# EAGLE board RGB_speakerbadge_thruvias (EAGLE 5.11)
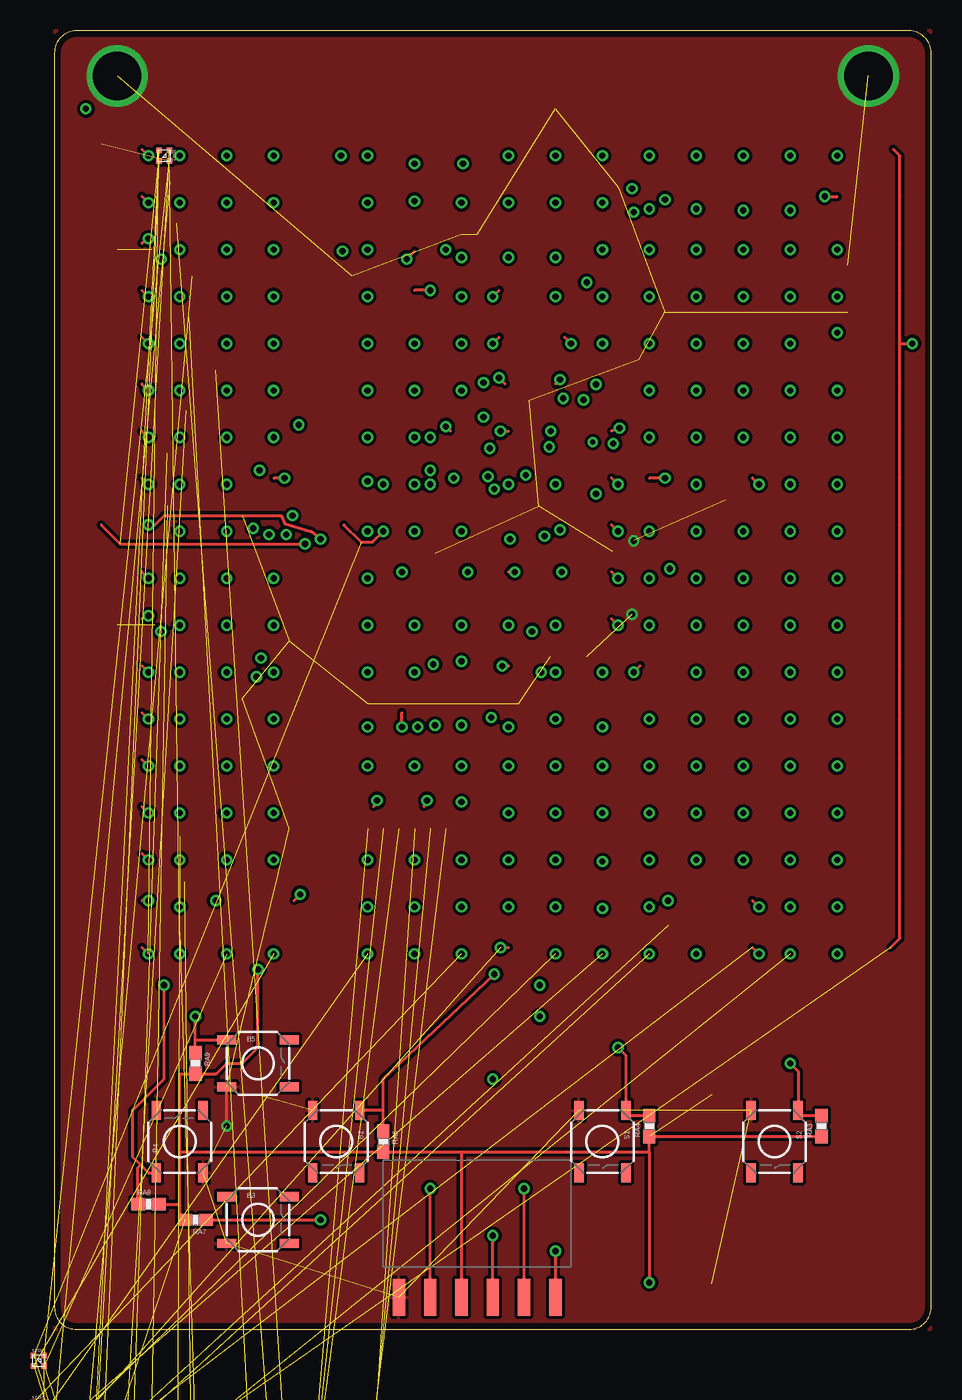
[diagram p0: board, top side]
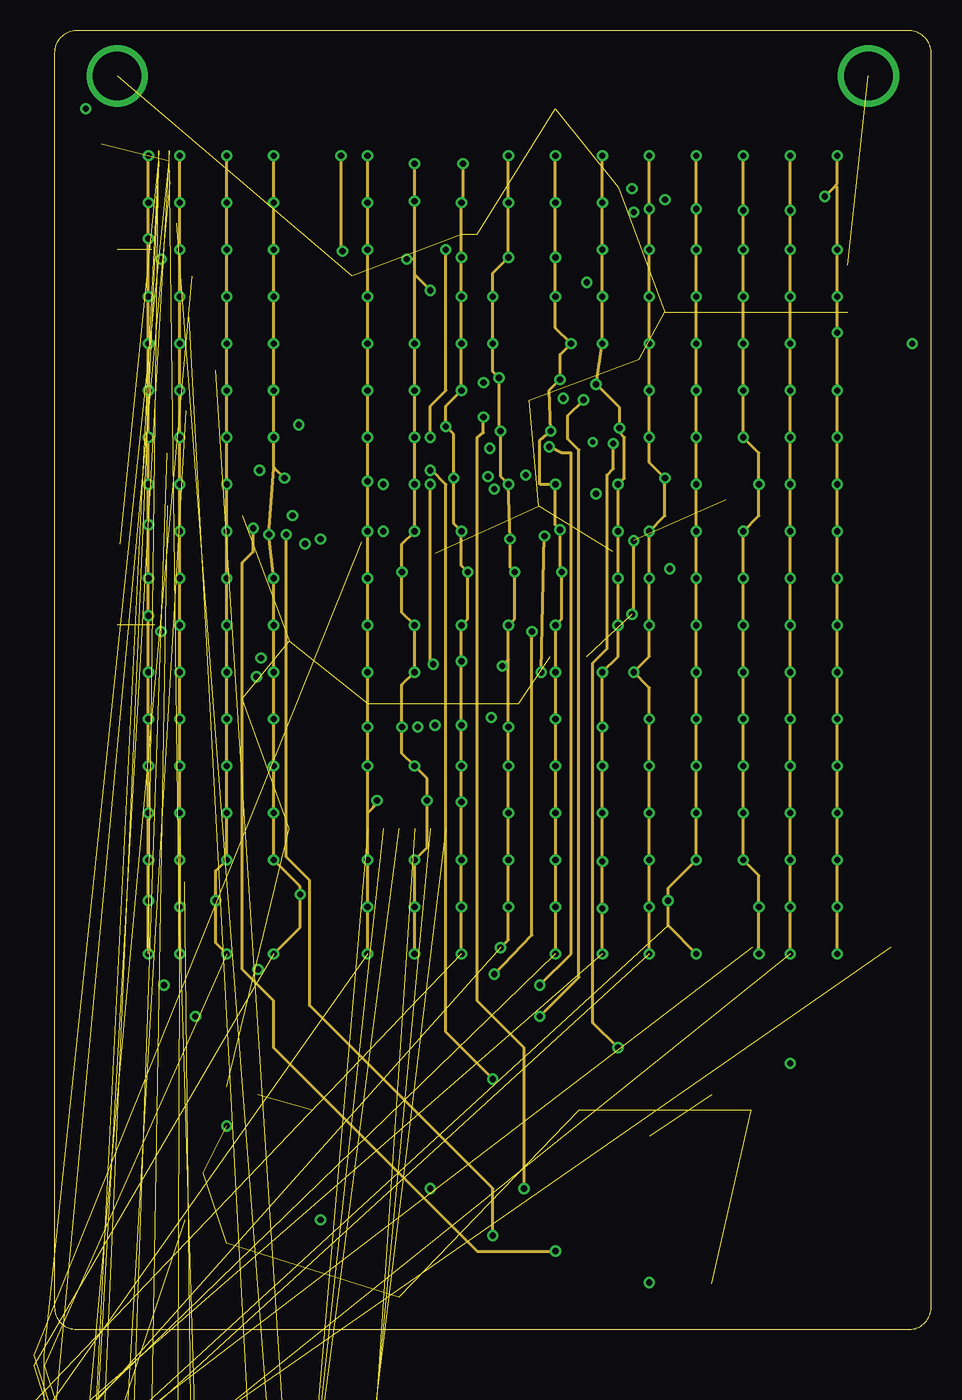
[diagram p1: board, inner layer gnd]
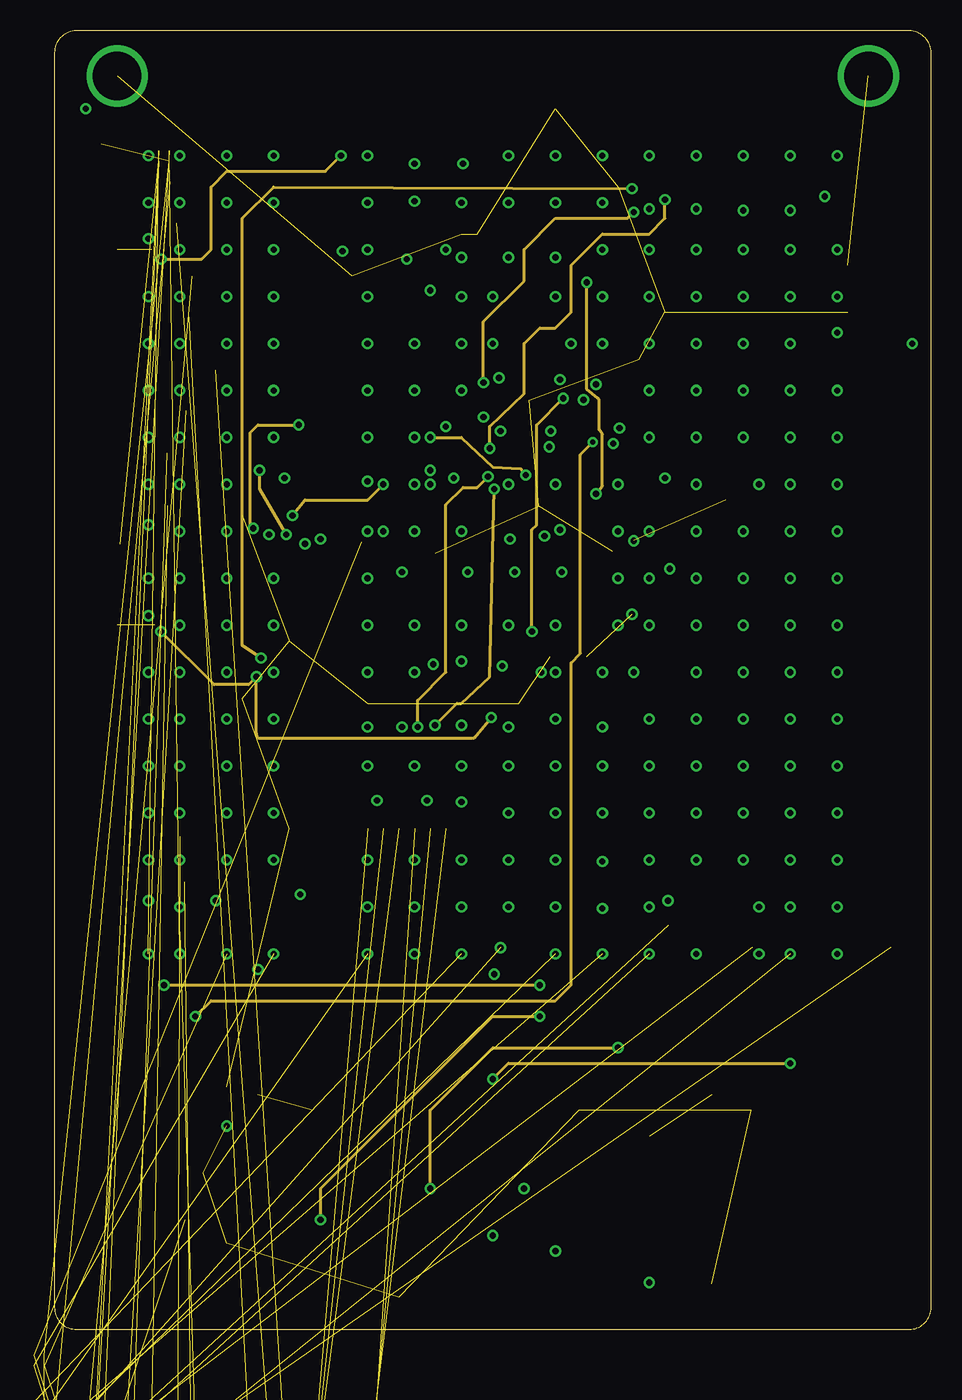
[diagram p2: board, inner layer vcc]
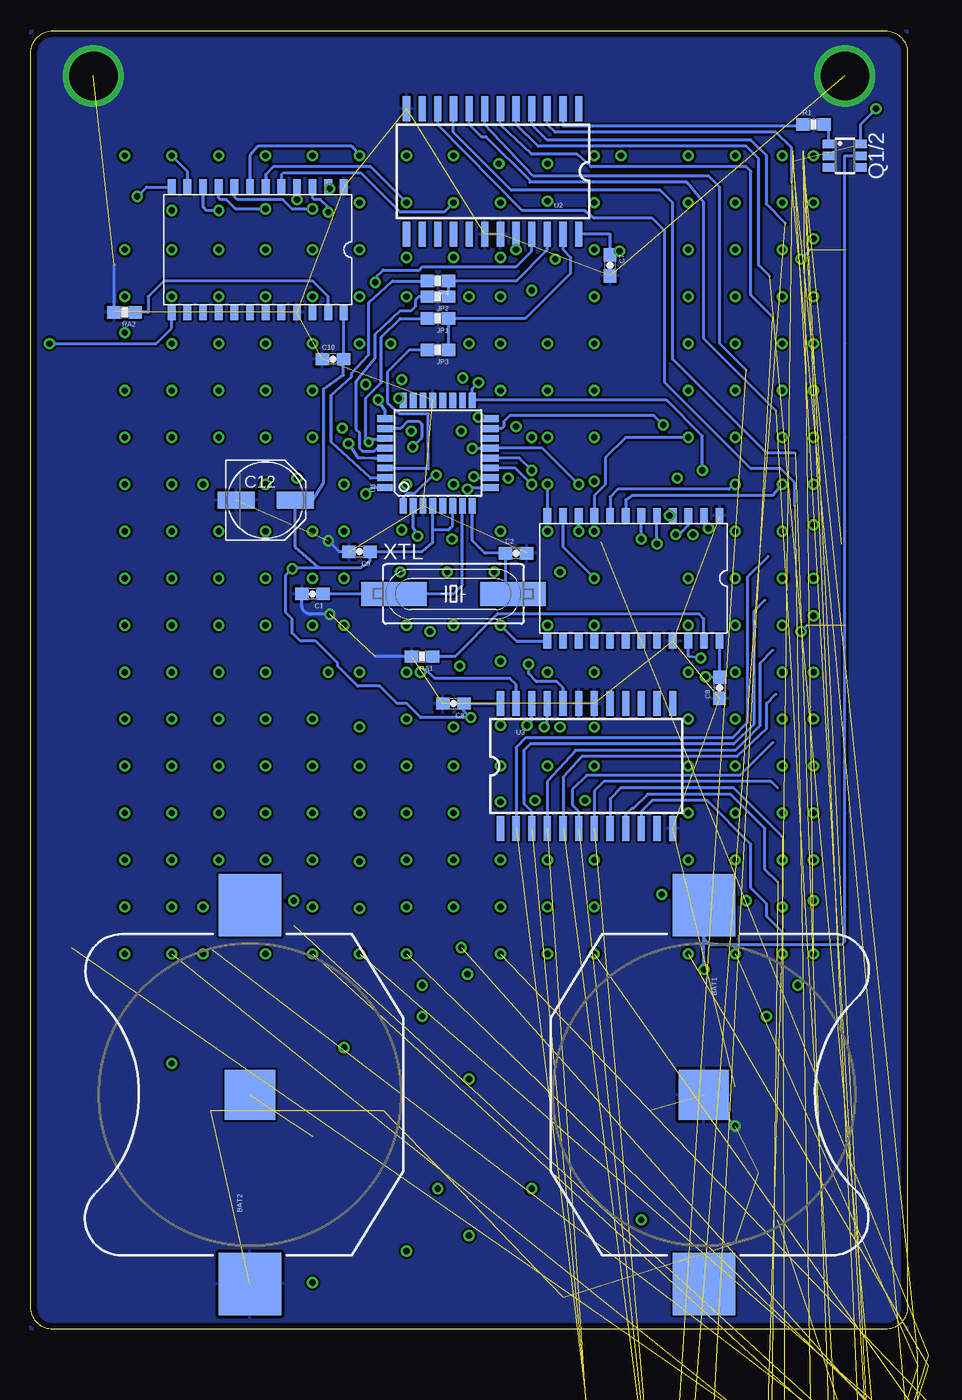
[diagram p3: board, bottom side, seen from below]

Size 71.12 x 105.39 mm. Coordinates in mm from the lower left corner, seen from the top.
Outline: 69.32,0 arc90 71.12,1.8 71.12,103.61 arc90 69.34,105.39 1.78,105.39 arc90 0,103.61 0,1.8 arc90 1.8,0 69.32,0
Copper layers (1*2*3*16): Top 0.0356mm / dielectric 1.5011mm / gnd 0.0356mm / dielectric 0.1499mm / vcc 0.0356mm / dielectric 0.2007mm / Bottom 0.0356mm
Design rules "SilverCircuits4layer *": minimum track width 7mil, minimum drill 14mil, track to track 7mil, track to pad 7mil, pad to pad 7mil, via to via 7mil, smd to smd 0mil, copper to edge 20mil, drill to drill 8mil, minimum pad ring 10mil, minimum via ring 8mil, stop-mask expansion 4mil, vias tented up to drill 0mil, thermal gap 10mil
Milling: 8 lines

## Footprints (pad centres in the part's own frame; a part is rotated, then mirrored left to right if it is on the bottom)
TACTILE_SWITCH_SMD = smd 1.524 x 0.762: 1 -2.54,1.905; 2 2.54,1.905; 3 -2.54,-1.905; 4 2.54,-1.905
NSL_SPARKFUN_BATTCON_245MM = smd 5.08 x 5.08: 1 -15.367,0; 3 15.367,0 | smd 4.064 x 4.064: 2 0,0
SPARKFUN_0603-CAP = smd 1.1 x 1: 1 -0.85,0; 2 0.85,0
PANASONIC_D = smd 3 x 1.4: + 2.4,0; - -2.4,0
SPARKFUN_0603-RES = smd 1.1 x 1: 1 -0.85,0; 2 0.85,0
1X06-SMD_EDGE = smd 1 x 3: 1 0,-0.08; 2 2.54,-0.08; 3 5.08,-0.08; 4 7.62,-0.08; 5 10.16,-0.08; 6 12.7,-0.08
0404_LED = smd 0.45 x 0.45: P$1 0.425,0.425; P$2 0.425,-0.425; P$3 -0.425,-0.425; P$4 -0.425,0.425
SSOT-6 = smd 0.69 x 0.99: 1 -0.95,-1.3; 2 0,-1.3; 3 0.95,-1.3; 4 0.95,1.3; 5 0,1.3; 6 -0.95,1.3
TQFP32-08 = smd 1.27 x 0.559: 1 -4.293,2.8; 2 -4.293,2; 3 -4.293,1.2; 4 -4.293,0.4; 5 -4.293,-0.4; 6 -4.293,-1.2; 7 -4.293,-2; 8 -4.293,-2.8; 17 4.293,-2.8; 18 4.293,-2; 19 4.293,-1.2; 20 4.293,-0.4; 21 4.293,0.4; 22 4.293,1.2; 23 4.293,2; 24 4.293,2.8 | smd 0.559 x 1.27: 9 -2.8,-4.293; 10 -2,-4.293; 11 -1.2,-4.293; 12 -0.4,-4.293; 13 0.4,-4.293; 14 1.2,-4.293; 15 2,-4.293; 16 2.8,-4.293; 25 2.8,4.293; 26 2,4.293; 27 1.2,4.293; 28 0.4,4.293; 29 -0.4,4.293; 30 -1.2,4.293; 31 -2,4.293; 32 -2.8,4.293
SO-24DW = smd 0.584 x 2.032: 1 -6.35,-5.08; 2 -5.08,-5.08; 3 -3.81,-5.08; 4 -2.54,-5.08; 5 -1.27,-5.08; 6 0,-5.08; 7 1.27,-5.08; 8 2.54,-5.08; 9 3.81,-5.08; 10 5.08,-5.08; 11 6.35,-5.08; 12 7.62,-5.08; 13 7.62,5.08; 14 6.35,5.08; 15 5.08,5.08; 16 3.81,5.08; 17 2.54,5.08; 18 1.27,5.08; 19 0,5.08; 20 -1.27,5.08; 21 -2.54,5.08; 22 -3.81,5.08; 23 -5.08,5.08; 24 -6.35,5.08
STP16DP05MTR = smd 0.635 x 1.27: 1 -7.62,-5.08; 2 -6.35,-5.08; 3 -5.08,-5.08; 4 -3.81,-5.08; 5 -2.54,-5.08; 6 -1.27,-5.08; 7 0,-5.08; 8 1.27,-5.08; 9 2.54,-5.08; 10 3.81,-5.08; 11 5.08,-5.08; 12 6.35,-5.08; 13 6.35,5.08; 14 5.08,5.08; 15 3.81,5.08; 16 2.54,5.08; 17 1.27,5.08; 18 0,5.08; 19 -1.27,5.08; 20 -2.54,5.08; 21 -3.81,5.08; 22 -5.08,5.08; 23 -6.35,5.08; 24 -7.62,5.08
HC49UP = smd 5.334 x 1.93: 1 -4.826,0; 2 4.826,0

## Placement (x,y rotation side)
B2  SWITCH-MOM-2SMD  [TACTILE_SWITCH_SMD]  22.86,15.24 270 top
B3  SWITCH-MOM-2SMD  [TACTILE_SWITCH_SMD]  16.51,8.89 0 top
B4  SWITCH-MOM-2SMD  [TACTILE_SWITCH_SMD]  10.16,15.24 90 top
B5  SWITCH-MOM-2SMD  [TACTILE_SWITCH_SMD]  16.51,21.59 0 top
BAT1  [NSL_SPARKFUN_BATTCON_245MM]  16.51,19.05 270 bottom
BAT2  [NSL_SPARKFUN_BATTCON_245MM]  53.34,19.05 90 bottom
C1  18pF  [SPARKFUN_0603-CAP]  48.26,59.69 180 bottom
C2  18pF  [SPARKFUN_0603-CAP]  31.75,62.99 0 bottom
C5  .1uF  [SPARKFUN_0603-CAP]  44.45,63.12 180 bottom
C7  .1uF  [SPARKFUN_0603-CAP]  24.13,86.36 270 bottom
C8  .1uF  [SPARKFUN_0603-CAP]  36.83,50.8 180 bottom
C9  .1uF  [SPARKFUN_0603-CAP]  15.24,52.07 90 bottom
C10  .1uF  [SPARKFUN_0603-CAP]  46.61,78.74 0 bottom
C12  100uF  [PANASONIC_D]  52.07,67.31 0 bottom
JP1  0ohm  [SPARKFUN_0603-RES]  38.1,82.04 180 bottom
JP2  0ohm  [SPARKFUN_0603-RES]  38.1,83.82 180 bottom
JP3  0ohm  [SPARKFUN_0603-RES]  38.1,79.5 180 bottom
JP4  0ohm  [SPARKFUN_0603-RES]  38.1,85.09 180 bottom
JP5  [1X06-SMD_EDGE]  40.64,2.54 180 top
LED1  LX0404SIUPGUSB  [0404_LED]  8.89,95.25 270 top
LED2  LX0404SIUPGUSB  [0404_LED]  -1.27,-2.54 0 top
LED3  LX0404SIUPGUSB  [0404_LED]  -1.27,-6.35 0 top  (outside the outline)
LED4  LX0404SIUPGUSB  [0404_LED]  -1.27,-10.16 0 top  (outside the outline)
LED5  LX0404SIUPGUSB  [0404_LED]  -1.27,-13.97 0 top  (outside the outline)
LED6  LX0404SIUPGUSB  [0404_LED]  -1.27,-17.78 0 top  (outside the outline)
LED7  LX0404SIUPGUSB  [0404_LED]  2.54,-30.48 0 top  (outside the outline)
LED8  LX0404SIUPGUSB  [0404_LED]  7.62,-30.48 0 top  (outside the outline)
LED9  LX0404SIUPGUSB  [0404_LED]  -1.27,-35.56 0 top  (outside the outline)
LED10  LX0404SIUPGUSB  [0404_LED]  3.81,-35.56 0 top  (outside the outline)
LED11  LX0404SIUPGUSB  [0404_LED]  8.89,-35.56 0 top  (outside the outline)
LED12  LX0404SIUPGUSB  [0404_LED]  -1.27,-39.37 0 top  (outside the outline)
LED13  LX0404SIUPGUSB  [0404_LED]  2.54,-60.96 0 top  (outside the outline)
LED14  LX0404SIUPGUSB  [0404_LED]  7.62,-60.96 0 top  (outside the outline)
LED15  LX0404SIUPGUSB  [0404_LED]  12.7,-60.96 0 top  (outside the outline)
LED16  LX0404SIUPGUSB  [0404_LED]  17.78,-60.96 0 top  (outside the outline)
LED17  LX0404SIUPGUSB  [0404_LED]  -1.27,-66.04 0 top  (outside the outline)
LED18  LX0404SIUPGUSB  [0404_LED]  21.59,-143.51 0 top  (outside the outline)
LED19  LX0404SIUPGUSB  [0404_LED]  8.89,-66.04 0 top  (outside the outline)
LED20  LX0404SIUPGUSB  [0404_LED]  13.97,-66.04 0 top  (outside the outline)
LED21  LX0404SIUPGUSB  [0404_LED]  19.05,-66.04 0 top  (outside the outline)
LED22  LX0404SIUPGUSB  [0404_LED]  -1.27,-69.85 0 top  (outside the outline)
LED23  LX0404SIUPGUSB  [0404_LED]  3.81,-69.85 0 top  (outside the outline)
LED24  LX0404SIUPGUSB  [0404_LED]  8.89,-69.85 0 top  (outside the outline)
LED25  LX0404SIUPGUSB  [0404_LED]  -1.27,-109.22 0 top  (outside the outline)
LED26  LX0404SIUPGUSB  [0404_LED]  3.81,-109.22 0 top  (outside the outline)
LED27  LX0404SIUPGUSB  [0404_LED]  26.67,-143.51 0 top  (outside the outline)
LED28  LX0404SIUPGUSB  [0404_LED]  13.97,-109.22 0 top  (outside the outline)
LED29  LX0404SIUPGUSB  [0404_LED]  19.05,-109.22 0 top  (outside the outline)
LED30  LX0404SIUPGUSB  [0404_LED]  24.13,-109.22 0 top  (outside the outline)
LED31  LX0404SIUPGUSB  [0404_LED]  29.21,-109.22 0 top  (outside the outline)
LED32  LX0404SIUPGUSB  [0404_LED]  -1.27,-113.03 0 top  (outside the outline)
LED33  LX0404SIUPGUSB  [0404_LED]  3.81,-113.03 0 top  (outside the outline)
LED34  LX0404SIUPGUSB  [0404_LED]  8.89,-113.03 0 top  (outside the outline)
LED35  LX0404SIUPGUSB  [0404_LED]  13.97,-113.03 0 top  (outside the outline)
LED36  LX0404SIUPGUSB  [0404_LED]  19.05,-113.03 0 top  (outside the outline)
LED37  LX0404SIUPGUSB  [0404_LED]  31.75,-143.51 0 top  (outside the outline)
LED38  LX0404SIUPGUSB  [0404_LED]  36.83,-143.51 0 top  (outside the outline)
LED39  LX0404SIUPGUSB  [0404_LED]  -1.27,-148.59 0 top  (outside the outline)
LED40  LX0404SIUPGUSB  [0404_LED]  3.81,-148.59 0 top  (outside the outline)
LED41  LX0404SIUPGUSB  [0404_LED]  8.89,-148.59 0 top  (outside the outline)
LED42  LX0404SIUPGUSB  [0404_LED]  13.97,-148.59 0 top  (outside the outline)
LED43  LX0404SIUPGUSB  [0404_LED]  19.05,-148.59 0 top  (outside the outline)
LED44  LX0404SIUPGUSB  [0404_LED]  24.13,-148.59 0 top  (outside the outline)
LED45  LX0404SIUPGUSB  [0404_LED]  29.21,-148.59 0 top  (outside the outline)
LED46  LX0404SIUPGUSB  [0404_LED]  34.29,-148.59 0 top  (outside the outline)
LED47  LX0404SIUPGUSB  [0404_LED]  39.37,-148.59 0 top  (outside the outline)
LED48  LX0404SIUPGUSB  [0404_LED]  -1.27,-152.4 0 top  (outside the outline)
LED49  LX0404SIUPGUSB  [0404_LED]  3.81,-152.4 0 top  (outside the outline)
LED50  LX0404SIUPGUSB  [0404_LED]  8.89,-152.4 0 top  (outside the outline)
LED51  LX0404SIUPGUSB  [0404_LED]  13.97,-152.4 0 top  (outside the outline)
LED52  LX0404SIUPGUSB  [0404_LED]  19.05,-152.4 0 top  (outside the outline)
LED53  LX0404SIUPGUSB  [0404_LED]  24.13,-152.4 0 top  (outside the outline)
LED54  LX0404SIUPGUSB  [0404_LED]  29.21,-152.4 0 top  (outside the outline)
LED55  LX0404SIUPGUSB  [0404_LED]  34.29,-152.4 0 top  (outside the outline)
LED56  LX0404SIUPGUSB  [0404_LED]  39.37,-152.4 0 top  (outside the outline)
LED57  LX0404SIUPGUSB  [0404_LED]  -1.27,-156.21 0 top  (outside the outline)
LED58  LX0404SIUPGUSB  [0404_LED]  3.81,-156.21 0 top  (outside the outline)
LED59  LX0404SIUPGUSB  [0404_LED]  8.89,-156.21 0 top  (outside the outline)
LED60  LX0404SIUPGUSB  [0404_LED]  13.97,-156.21 0 top  (outside the outline)
LED61  LX0404SIUPGUSB  [0404_LED]  19.05,-156.21 0 top  (outside the outline)
LED62  LX0404SIUPGUSB  [0404_LED]  24.13,-156.21 0 top  (outside the outline)
LED63  LX0404SIUPGUSB  [0404_LED]  29.21,-156.21 0 top  (outside the outline)
LED64  LX0404SIUPGUSB  [0404_LED]  34.29,-156.21 0 top  (outside the outline)
LED65  LX0404SIUPGUSB  [0404_LED]  39.37,-156.21 0 top  (outside the outline)
LED66  LX0404SIUPGUSB  [0404_LED]  -1.27,-160.02 0 top  (outside the outline)
LED67  LX0404SIUPGUSB  [0404_LED]  3.81,-160.02 0 top  (outside the outline)
LED68  LX0404SIUPGUSB  [0404_LED]  8.89,-160.02 0 top  (outside the outline)
LED69  LX0404SIUPGUSB  [0404_LED]  21.59,-190.5 0 top  (outside the outline)
LED70  LX0404SIUPGUSB  [0404_LED]  26.67,-190.5 0 top  (outside the outline)
LED71  LX0404SIUPGUSB  [0404_LED]  31.75,-190.5 0 top  (outside the outline)
LED72  LX0404SIUPGUSB  [0404_LED]  36.83,-190.5 0 top  (outside the outline)
LED73  LX0404SIUPGUSB  [0404_LED]  -1.27,-195.58 0 top  (outside the outline)
LED74  LX0404SIUPGUSB  [0404_LED]  3.81,-195.58 0 top  (outside the outline)
LED75  LX0404SIUPGUSB  [0404_LED]  8.89,-195.58 0 top  (outside the outline)
LED76  LX0404SIUPGUSB  [0404_LED]  13.97,-195.58 0 top  (outside the outline)
LED77  LX0404SIUPGUSB  [0404_LED]  19.05,-195.58 0 top  (outside the outline)
LED78  LX0404SIUPGUSB  [0404_LED]  24.13,-195.58 0 top  (outside the outline)
LED79  LX0404SIUPGUSB  [0404_LED]  29.21,-195.58 0 top  (outside the outline)
LED80  LX0404SIUPGUSB  [0404_LED]  34.29,-195.58 0 top  (outside the outline)
LED81  LX0404SIUPGUSB  [0404_LED]  39.37,-195.58 0 top  (outside the outline)
LED82  LX0404SIUPGUSB  [0404_LED]  -1.27,-199.39 0 top  (outside the outline)
LED83  LX0404SIUPGUSB  [0404_LED]  3.81,-199.39 0 top  (outside the outline)
LED84  LX0404SIUPGUSB  [0404_LED]  8.89,-199.39 0 top  (outside the outline)
LED85  LX0404SIUPGUSB  [0404_LED]  13.97,-199.39 0 top  (outside the outline)
LED86  LX0404SIUPGUSB  [0404_LED]  19.05,-199.39 0 top  (outside the outline)
LED87  LX0404SIUPGUSB  [0404_LED]  24.13,-199.39 0 top  (outside the outline)
LED88  LX0404SIUPGUSB  [0404_LED]  29.21,-199.39 0 top  (outside the outline)
LED89  LX0404SIUPGUSB  [0404_LED]  34.29,-199.39 0 top  (outside the outline)
LED90  LX0404SIUPGUSB  [0404_LED]  39.37,-199.39 0 top  (outside the outline)
LED91  LX0404SIUPGUSB  [0404_LED]  -1.27,-203.2 0 top  (outside the outline)
LED92  LX0404SIUPGUSB  [0404_LED]  3.81,-203.2 0 top  (outside the outline)
LED93  LX0404SIUPGUSB  [0404_LED]  8.89,-203.2 0 top  (outside the outline)
LED94  LX0404SIUPGUSB  [0404_LED]  13.97,-203.2 0 top  (outside the outline)
LED95  LX0404SIUPGUSB  [0404_LED]  19.05,-203.2 0 top  (outside the outline)
LED96  LX0404SIUPGUSB  [0404_LED]  24.13,-203.2 0 top  (outside the outline)
LED97  LX0404SIUPGUSB  [0404_LED]  29.21,-203.2 0 top  (outside the outline)
LED98  LX0404SIUPGUSB  [0404_LED]  34.29,-203.2 0 top  (outside the outline)
LED99  LX0404SIUPGUSB  [0404_LED]  39.37,-203.2 0 top  (outside the outline)
LED100  LX0404SIUPGUSB  [0404_LED]  -1.27,-207.01 0 top  (outside the outline)
LED101  LX0404SIUPGUSB  [0404_LED]  3.81,-207.01 0 top  (outside the outline)
LED102  LX0404SIUPGUSB  [0404_LED]  8.89,-207.01 0 top  (outside the outline)
Q1/1  FMB3906SUPERSOT-6  [SSOT-6]  0,-24.13 0 top  (outside the outline)
Q1/2  FMB3906SUPERSOT-6  [SSOT-6]  5.08,95.25 270 bottom
Q1/3  FMB3906SUPERSOT-6  [SSOT-6]  0,-45.72 0 top  (outside the outline)
Q1/4  FMB3906SUPERSOT-6  [SSOT-6]  0,-54.61 0 top  (outside the outline)
Q1/5  FMB3906SUPERSOT-6  [SSOT-6]  0,-76.2 0 top  (outside the outline)
Q1/6  FMB3906SUPERSOT-6  [SSOT-6]  0,-85.09 0 top  (outside the outline)
Q1/7  FMB3906SUPERSOT-6  [SSOT-6]  0,-119.38 0 top  (outside the outline)
Q1/8  FMB3906SUPERSOT-6  [SSOT-6]  21.59,-119.38 0 top  (outside the outline)
Q1/9  FMB3906SUPERSOT-6  [SSOT-6]  0,-128.27 0 top  (outside the outline)
Q1/10  FMB3906SUPERSOT-6  [SSOT-6]  21.59,-128.27 0 top  (outside the outline)
Q1/11  FMB3906SUPERSOT-6  [SSOT-6]  0,-137.16 0 top  (outside the outline)
Q1/12  FMB3906SUPERSOT-6  [SSOT-6]  21.59,-137.16 0 top  (outside the outline)
Q1/13  FMB3906SUPERSOT-6  [SSOT-6]  0,-166.37 0 top  (outside the outline)
Q1/14  FMB3906SUPERSOT-6  [SSOT-6]  21.59,-166.37 0 top  (outside the outline)
Q1/15  FMB3906SUPERSOT-6  [SSOT-6]  0,-175.26 0 top  (outside the outline)
Q1/16  FMB3906SUPERSOT-6  [SSOT-6]  21.59,-175.26 0 top  (outside the outline)
Q1/17  FMB3906SUPERSOT-6  [SSOT-6]  0,-184.15 0 top  (outside the outline)
Q1/18  FMB3906SUPERSOT-6  [SSOT-6]  21.59,-184.15 0 top  (outside the outline)
R1  620  [SPARKFUN_0603-RES]  7.62,97.79 0 bottom
R2  620  [SPARKFUN_0603-RES]  -1.27,-30.48 0 top  (outside the outline)
R3  620  [SPARKFUN_0603-RES]  21.59,-52.07 0 top  (outside the outline)
R4  620  [SPARKFUN_0603-RES]  -1.27,-60.96 0 top  (outside the outline)
R5  620  [SPARKFUN_0603-RES]  21.59,-100.33 0 top  (outside the outline)
R6  620  [SPARKFUN_0603-RES]  25.4,-100.33 0 top  (outside the outline)
R7  620  [SPARKFUN_0603-RES]  -1.27,-143.51 0 top  (outside the outline)
R8  620  [SPARKFUN_0603-RES]  2.54,-143.51 0 top  (outside the outline)
R9  620  [SPARKFUN_0603-RES]  6.35,-143.51 0 top  (outside the outline)
R10  620  [SPARKFUN_0603-RES]  10.16,-143.51 0 top  (outside the outline)
R11  620  [SPARKFUN_0603-RES]  13.97,-143.51 0 top  (outside the outline)
R12  620  [SPARKFUN_0603-RES]  17.78,-143.51 0 top  (outside the outline)
R13  620  [SPARKFUN_0603-RES]  -1.27,-190.5 0 top  (outside the outline)
R14  620  [SPARKFUN_0603-RES]  2.54,-190.5 0 top  (outside the outline)
R15  620  [SPARKFUN_0603-RES]  6.35,-190.5 0 top  (outside the outline)
R16  620  [SPARKFUN_0603-RES]  10.16,-190.5 0 top  (outside the outline)
R17  620  [SPARKFUN_0603-RES]  13.97,-190.5 0 top  (outside the outline)
R18  620  [SPARKFUN_0603-RES]  17.78,-190.5 0 top  (outside the outline)
RA1  1k  [SPARKFUN_0603-RES]  39.37,54.61 180 bottom
RA2  1k  [SPARKFUN_0603-RES]  63.5,82.55 180 bottom
RA3  5K  [SPARKFUN_0603-RES]  62.23,16.51 90 top
RA4  10K  [SPARKFUN_0603-RES]  48.26,16.51 90 top
RA6  5k  [SPARKFUN_0603-RES]  26.67,15.24 270 top
RA7  5k  [SPARKFUN_0603-RES]  11.43,8.89 180 top
RA8  5k  [SPARKFUN_0603-RES]  7.62,10.16 0 top
RA9  5k  [SPARKFUN_0603-RES]  11.43,21.59 270 top
S1  SWITCH-MOM-2SMD  [TACTILE_SWITCH_SMD]  44.45,15.24 270 top
S2  SWITCH-MOM-2SMD  [TACTILE_SWITCH_SMD]  58.42,15.24 270 top
U1  ATMEGA328  [TQFP32-08]  38.1,71.12 90 bottom
U2  CD74HC154M  [SO-24DW]  33.02,93.98 180 bottom
U3  CD74HC154M  [SO-24DW]  26.67,45.72 0 bottom
U4  STP16DP05MTR  [STP16DP05MTR]  22.86,60.96 180 bottom
U5  STP16DP05MTR  [STP16DP05MTR]  53.34,87.63 180 bottom
U$1  LX0404SIUPGUSB  [0404_LED]  13.97,-160.02 0 top  (outside the outline)
U$2  LX0404SIUPGUSB  [0404_LED]  19.05,-160.02 0 top  (outside the outline)
U$3  LX0404SIUPGUSB  [0404_LED]  13.97,-207.01 0 top  (outside the outline)
U$4  LX0404SIUPGUSB  [0404_LED]  19.05,-207.01 0 top  (outside the outline)
U$18  LX0404SIUPGUSB  [0404_LED]  3.81,-66.04 0 top  (outside the outline)
U$27  LX0404SIUPGUSB  [0404_LED]  8.89,-109.22 0 top  (outside the outline)
XTL  16MHZ  [HC49UP]  36.83,59.69 0 bottom

## Library data of the parts
B2-B5 C12 JP5 S1 S2 U1-U3 XTL = SparkFun
BAT1 BAT2 C1 C2 C5 C7-C10 JP1-JP4 R1-R18 RA1-RA4 RA6-RA9 U4 U5 = Nullspace
LED1-LED102 U$1-U$4 U$18 U$27 = 0404_RGB_LED
Q1/1-Q1/18 = fairchild-semic

## Nets
A0: JP1.1 JP3.1 U2.23
A1: JP2.1 JP4.1 U2.22
COL1: LED1.P$2 LED7.P$2 LED13.P$2 LED18.P$2 LED19.P$2 LED25.P$2 LED31.P$2 LED41.P$2 LED47.P$2 LED52.P$2 LED58.P$2 LED63.P$2 LED69.P$2 LED75.P$2 LED81.P$2 LED86.P$2 LED92.P$2 LED97.P$2 U4.5
COL2: LED1.P$3 LED7.P$3 LED13.P$3 LED18.P$3 LED19.P$3 LED25.P$3 LED31.P$3 LED41.P$3 LED47.P$3 LED52.P$3 LED58.P$3 LED63.P$3 LED69.P$3 LED75.P$3 LED81.P$3 LED86.P$3 LED92.P$3 LED97.P$3 U4.6
COL3: LED1.P$4 LED7.P$4 LED13.P$4 LED18.P$4 LED19.P$4 LED25.P$4 LED31.P$4 LED41.P$4 LED47.P$4 LED52.P$4 LED58.P$4 LED63.P$4 LED69.P$4 LED75.P$4 LED81.P$4 LED86.P$4 LED92.P$4 LED97.P$4 U4.7
COL4: LED2.P$2 LED8.P$2 LED14.P$2 LED20.P$2 LED26.P$2 LED27.P$2 LED32.P$2 LED42.P$2 LED48.P$2 LED53.P$2 LED59.P$2 LED64.P$2 LED70.P$2 LED76.P$2 LED82.P$2 LED87.P$2 LED93.P$2 LED98.P$2 U4.8
COL5: LED2.P$3 LED8.P$3 LED14.P$3 LED20.P$3 LED26.P$3 LED27.P$3 LED32.P$3 LED42.P$3 LED48.P$3 LED53.P$3 LED59.P$3 LED64.P$3 LED70.P$3 LED76.P$3 LED82.P$3 LED87.P$3 LED93.P$3 LED98.P$3 U4.9
COL6: LED2.P$4 LED8.P$4 LED14.P$4 LED20.P$4 LED26.P$4 LED27.P$4 LED32.P$4 LED42.P$4 LED48.P$4 LED53.P$4 LED59.P$4 LED64.P$4 LED70.P$4 LED76.P$4 LED82.P$4 LED87.P$4 LED93.P$4 LED98.P$4 U4.10
COL7: LED3.P$2 LED9.P$2 LED15.P$2 LED21.P$2 LED33.P$2 LED37.P$2 LED43.P$2 LED49.P$2 LED54.P$2 LED65.P$2 LED71.P$2 LED77.P$2 LED83.P$2 LED88.P$2 LED99.P$2 U4.11 U$2.P$2 U$4.P$2 U$27.P$2
COL8: U4.12
COL9: LED3.P$4 LED9.P$4 LED15.P$4 LED21.P$4 LED33.P$4 LED37.P$4 LED43.P$4 LED49.P$4 LED54.P$4 LED65.P$4 LED71.P$4 LED77.P$4 LED83.P$4 LED88.P$4 LED99.P$4 U4.13 U$2.P$4 U$4.P$4 U$27.P$4
COL10: LED4.P$2 LED10.P$2 LED16.P$2 LED22.P$2 LED28.P$2 LED34.P$2 LED38.P$2 LED44.P$2 LED50.P$2 LED55.P$2 LED60.P$2 LED66.P$2 LED72.P$2 LED78.P$2 LED84.P$2 LED89.P$2 LED94.P$2 LED100.P$2 U5.5
COL11: LED4.P$3 LED10.P$3 LED16.P$3 LED22.P$3 LED28.P$3 LED34.P$3 LED38.P$3 LED44.P$3 LED50.P$3 LED55.P$3 LED60.P$3 LED66.P$3 LED72.P$3 LED78.P$3 LED84.P$3 LED89.P$3 LED94.P$3 LED100.P$3 U5.6
COL12: LED4.P$4 LED10.P$4 LED16.P$4 LED22.P$4 LED28.P$4 LED34.P$4 LED38.P$4 LED44.P$4 LED50.P$4 LED55.P$4 LED60.P$4 LED66.P$4 LED72.P$4 LED78.P$4 LED84.P$4 LED89.P$4 LED94.P$4 LED100.P$4 U5.7
COL13: LED5.P$2 LED11.P$2 LED17.P$2 LED23.P$2 LED29.P$2 LED35.P$2 LED39.P$2 LED45.P$2 LED51.P$2 LED56.P$2 LED61.P$2 LED67.P$2 LED73.P$2 LED79.P$2 LED85.P$2 LED90.P$2 LED95.P$2 LED101.P$2 U5.8
COL14: LED5.P$3 LED11.P$3 LED17.P$3 LED23.P$3 LED29.P$3 LED35.P$3 LED39.P$3 LED45.P$3 LED51.P$3 LED56.P$3 LED61.P$3 LED67.P$3 LED73.P$3 LED79.P$3 LED85.P$3 LED90.P$3 LED95.P$3 LED101.P$3 U5.9
COL15: LED5.P$4 LED11.P$4 LED17.P$4 LED23.P$4 LED29.P$4 LED35.P$4 LED39.P$4 LED45.P$4 LED51.P$4 LED56.P$4 LED61.P$4 LED67.P$4 LED73.P$4 LED79.P$4 LED85.P$4 LED90.P$4 LED95.P$4 LED101.P$4 U5.10
COL16: LED6.P$2 LED12.P$2 LED24.P$2 LED30.P$2 LED36.P$2 LED40.P$2 LED46.P$2 LED57.P$2 LED62.P$2 LED68.P$2 LED74.P$2 LED80.P$2 LED91.P$2 LED96.P$2 LED102.P$2 U5.11 U$1.P$2 U$3.P$2 U$18.P$2
COL17: U5.12
COL18: LED6.P$4 LED12.P$4 LED24.P$4 LED30.P$4 LED36.P$4 LED40.P$4 LED46.P$4 LED57.P$4 LED62.P$4 LED68.P$4 LED74.P$4 LED80.P$4 LED91.P$4 LED96.P$4 LED102.P$4 U5.13 U$1.P$4 U$3.P$4 U$18.P$4
GND: B2.3 B3.3 B4.3 B5.3 BAT1.2 BAT2.1 C1.2 C2.2 C5.2 C7.2 C8.2 C9.1 C10.1 C12.- JP5.6 RA1.2 RA2.2 S1.3 S2.3 U1.3 U1.21 U2.12 U2.18 U2.19 U3.12 U3.18 U3.19 U4.1 U4.21 U5.1 U5.21
LED18: LED6.P$3 LED12.P$3 LED24.P$3 LED30.P$3 LED36.P$3 LED40.P$3 LED46.P$3 LED57.P$3 LED62.P$3 LED68.P$3 LED74.P$3 LED80.P$3 LED91.P$3 LED96.P$3 LED102.P$3 U$1.P$3 U$3.P$3 U$18.P$3
LED27: LED3.P$3 LED9.P$3 LED15.P$3 LED21.P$3 LED33.P$3 LED37.P$3 LED43.P$3 LED49.P$3 LED54.P$3 LED65.P$3 LED71.P$3 LED77.P$3 LED83.P$3 LED88.P$3 LED99.P$3 U$2.P$3 U$4.P$3 U$27.P$3
LINE1: LED1.P$1 LED2.P$1 LED3.P$1 LED4.P$1 LED5.P$1 LED6.P$1 Q1/2.6
LINE2: LED7.P$1 LED8.P$1 LED9.P$1 LED10.P$1 LED11.P$1 LED12.P$1 Q1/1.6
LINE3: LED13.P$1 LED14.P$1 LED15.P$1 LED16.P$1 LED17.P$1 Q1/3.6 U$18.P$1
LINE4: LED19.P$1 LED20.P$1 LED21.P$1 LED22.P$1 LED23.P$1 LED24.P$1 Q1/4.6
LINE5: LED25.P$1 LED26.P$1 LED28.P$1 LED29.P$1 LED30.P$1 Q1/5.6 U$27.P$1
LINE6: LED31.P$1 LED32.P$1 LED33.P$1 LED34.P$1 LED35.P$1 LED36.P$1 Q1/6.6
LINE7: LED18.P$1 LED27.P$1 LED37.P$1 LED38.P$1 LED39.P$1 LED40.P$1 Q1/7.6
LINE8: LED41.P$1 LED42.P$1 LED43.P$1 LED44.P$1 LED45.P$1 LED46.P$1 Q1/8.6
LINE9: LED47.P$1 LED48.P$1 LED49.P$1 LED50.P$1 LED51.P$1 Q1/9.6 U$1.P$1
LINE10: LED52.P$1 LED53.P$1 LED54.P$1 LED55.P$1 LED56.P$1 LED57.P$1 Q1/10.6
LINE11: LED58.P$1 LED59.P$1 LED60.P$1 LED61.P$1 LED62.P$1 Q1/11.6 U$2.P$1
LINE12: LED63.P$1 LED64.P$1 LED65.P$1 LED66.P$1 LED67.P$1 LED68.P$1 Q1/12.6
LINE13: LED69.P$1 LED70.P$1 LED71.P$1 LED72.P$1 LED73.P$1 LED74.P$1 Q1/13.6
LINE14: LED75.P$1 LED76.P$1 LED77.P$1 LED78.P$1 LED79.P$1 LED80.P$1 Q1/14.6
LINE15: LED81.P$1 LED82.P$1 LED83.P$1 LED84.P$1 LED85.P$1 Q1/15.6 U$3.P$1
LINE16: LED86.P$1 LED87.P$1 LED88.P$1 LED89.P$1 LED90.P$1 LED91.P$1 Q1/16.6
LINE17: LED92.P$1 LED93.P$1 LED94.P$1 LED95.P$1 LED96.P$1 Q1/17.6 U$4.P$1
LINE18: LED97.P$1 LED98.P$1 LED99.P$1 LED100.P$1 LED101.P$1 LED102.P$1 Q1/18.6
MISO: JP5.2 U1.16
MOSI: JP5.1 U1.15 U4.2
N$1: Q1/7.1 R7.2
N$2: Q1/2.1 R1.2
N$3: Q1/8.1 R8.2
N$4: Q1/9.1 R9.2
N$5: Q1/10.1 R10.2
N$6: Q1/5.1 R5.2
N$7: Q1/11.1 R11.2
N$8: Q1/1.1 R2.2
N$9: Q1/12.1 R12.2
N$10: Q1/3.1 R3.2
N$11: Q1/13.1 R13.2
N$12: Q1/14.1 R14.2
N$13: Q1/15.1 R15.2
N$14: Q1/16.1 R16.2
N$15: Q1/17.1 R17.2
N$16: Q1/18.1 R18.2
N$48: Q1/4.1 R4.2
N$55: Q1/6.1 R6.2
N$127: RA2.1 U5.23
N$139: RA1.1 U4.23
PB0: RA3.2 S2.1 U1.12
PB1: U1.13 U4.4 U5.4
PB6: C1.1 U1.7 XTL.1
PB7: C2.1 U1.8 XTL.2
PC1: B2.1 RA6.1 U1.24
PC2: B3.1 RA7.1 U1.25
PC3: B4.1 RA8.1 U1.26
PC4: B5.1 JP1.2 RA9.1 U1.27
PC5: JP2.2 U1.28
PD0: JP3.2 U1.30
PD1: JP4.2 U1.31
PD2: U1.32 U2.21
PD3: U1.1 U2.20
PD4: U1.2 U3.23
PD5: U1.9 U3.22
PD6: U1.10 U3.21
PD7: U1.11 U3.20
ROW1: R1.1 U2.2
ROW2: R2.1 U2.3
ROW3: R3.1 U2.4
ROW4: R4.1 U2.5
ROW5: R5.1 U2.6
ROW6: R6.1 U2.7
ROW7: R7.1 U2.8
ROW8: R8.1 U2.9
ROW9: R9.1 U2.10
ROW10: R10.1 U3.2
ROW11: R11.1 U3.3
ROW12: R12.1 U3.4
ROW13: R13.1 U3.5
ROW14: R14.1 U3.6
ROW15: R15.1 U3.7
ROW16: R16.1 U3.8
ROW17: R17.1 U3.9
ROW18: R18.1 U3.10
RST: JP5.5 RA4.2 S1.1 U1.29
SCK: JP5.3 U1.17 U4.3 U5.3
SDI: U4.22 U5.2
VCC: BAT1.1 BAT2.2 C5.1 C7.1 C8.1 C9.2 C10.2 C12.+ JP5.4 Q1/1.5 Q1/2.5 Q1/4.5 Q1/6.5 Q1/7.5 Q1/8.5 Q1/10.5 Q1/12.5 Q1/13.5 Q1/14.5 Q1/16.5 Q1/18.5 RA3.1 RA4.1 RA6.2 RA7.2 RA8.2 RA9.2 U1.4 U1.6 U2.24 U3.24 U4.24 U5.24

## Tracks (layer width: path | path; a pad name or v marks a point on that pad's centre or on a via)
A0
  Bottom 0.254: JP3.1 JP1.1 30.99,82.04 27.3,85.72 27.3,87 27.94,87.63 U2.23
A1
  Bottom 0.254: JP2.1 JP4.1 31.75,85.09 29.21,87.63 U2.22
COL1  (via drill 0.51)  (18 unrouted)
  Top 0.254: 3.8,65.29 5.33,63.75 v20.32,63.75
  Bottom 0.254: v20.32,63.75 U4.5
COL2  (via drill 0.51)  (18 unrouted)
  Top 0.254: v7.62,95.25 7.1,95.77 | v7.62,91.44 7.1,91.96 | v7.62,65.29 8.14,65.29 8.89,66.04 18.41,66.04 18.67,65.41 20.83,64.77 v21.59,64.14 | v7.62,88.52 7.1,88.15 | v7.62,83.82 7.1,84.34 | v7.62,80.01 7.1,80.53 | v7.62,76.2 7.1,76.72 | v7.62,72.39 7.1,72.91 | v7.62,68.58 7.1,69.1 | v7.62,60.96 7.1,61.48 | v7.62,57.91 7.1,57.67 | v7.62,53.34 7.1,53.86 | v7.62,49.53 7.1,50.05 | v7.62,45.72 7.1,46.24 | v7.62,41.91 7.1,42.43 | v7.62,38.1 7.1,38.62 | v7.62,34.8 7.1,34.81 | 7.1,31 v7.62,30.48
  gnd 0.254: v7.62,95.25 v7.62,91.44 v7.62,88.52 v7.62,83.82 v7.62,80.01 v7.62,76.2 v7.62,72.39 v7.62,68.58 v7.62,65.29 v7.62,60.96 v7.62,57.91 v7.62,53.34 v7.62,49.53 v7.62,45.72 v7.62,41.91 v7.62,38.1 v7.62,34.8 v7.62,30.48
  Bottom 0.254: v21.59,64.14 U4.6
COL3  (via drill 0.51)  (18 unrouted)
  gnd 0.254: v10.16,95.25 v10.16,91.44 v10.16,87.63 v10.16,83.82 v10.16,80.01 v10.16,76.2 v10.16,72.39 v10.16,68.58 v10.16,64.77 v10.16,60.96 v10.16,57.15 v10.16,53.34 v10.16,49.53 v10.16,45.72 v10.16,41.91 v10.16,38.1 v10.16,34.29 v10.16,30.48
  Bottom 0.254: U4.7 22.86,67.31 22.35,67.69 10.92,67.69 v10.16,68.58
COL4  (via drill 0.51)  (18 unrouted)
  gnd 0.254: v13.97,95.25 v13.97,91.44 v13.97,87.63 13.97,84.34 v13.97,83.82 v13.97,80.01 v13.97,76.2 v13.97,72.39 v13.97,68.58 v13.97,64.77 v13.97,60.96 v13.97,57.15 v13.97,53.34 v13.97,49.53 v13.97,45.72 v13.97,41.91 v13.97,38.1 13.08,37.21 v13.08,34.8 13.08,31.37 v13.97,30.48
  Bottom 0.254: U4.8 24.13,67.56 23.5,68.2 14.48,68.2 14.1,68.58 v13.97,68.58
COL5  (via drill 0.51)  (18 unrouted)
  Top 0.254: v18.67,69.09 17.79,69.09 | v19.94,35.31 19.44,34.81
  gnd 0.254: v17.78,95.25 v17.78,91.44 v17.78,87.63 v17.78,83.82 v17.78,80.01 v17.78,76.2 v17.78,72.39 17.78,69.98 17.84,69.91 | 17.84,69.91 v18.67,69.09 | 17.84,69.91 17.78,69.85 v17.4,64.52 v17.78,60.96 v17.78,57.15 v17.78,53.34 v17.78,49.53 v17.78,45.72 v17.78,41.91 v17.78,38.1 19.94,35.94 v19.94,35.31 19.94,32.64 v17.78,30.48
  Bottom 0.254: U4.9 25.4,67.69 24.51,68.58 24.51,70.74 22.86,72.39 v17.78,72.39
COL6  (via drill 0.51)  (18 unrouted)
  Top 0.254: 23.48,65.29 24.89,63.88 25.78,63.88 v26.67,64.77
  Bottom 0.254: v26.67,64.77 U4.10
COL7  (via drill 0.51)  (18 unrouted)
  Top 0.254: v26.16,42.93 25.9,42.43
  gnd 0.254: v25.4,95.25 v25.4,91.44 v25.4,87.63 v25.4,83.82 v25.4,80.01 v25.4,76.2 v25.4,72.39 v25.4,68.83 v25.4,64.77 v25.4,60.96 v25.4,57.15 v25.4,53.34 v25.4,48.9 v25.4,45.72 25.4,41.91 | v25.4,38.1 25.41,38.11 | v25.4,38.1 v25.4,34.29 v25.4,30.48 | v25.4,38.1 25.4,41.91 | v26.16,42.93 25.91,42.42 25.4,41.91
  Bottom 0.254: U4.11 27.94,63.5 v25.4,60.96
COL8  (via drill 0.51)
  Top 0.254: v28.57,86.87 29.21,87.5 | v30.48,84.33 29.22,84.33 | v28.19,61.47 28.21,61.48 | v30.23,42.93 29.96,42.43 | v28.19,48.9 28.19,50.05
  gnd 0.254: v29.21,94.61 v29.21,91.57 29.21,86.87 | 29.21,86.87 v28.57,86.87 | 29.21,85.6 29.21,86.87 | 29.21,85.6 v30.48,84.33 | 29.21,85.6 v29.21,80.01 v29.21,76.2 v29.21,72.39 v29.21,68.58 v29.21,64.77 28.19,63.75 v28.19,61.47 28.19,58.17 v29.21,57.15 v29.21,53.34 28.19,52.32 v28.19,48.9 28.19,46.74 v29.21,45.72 30.23,44.7 v30.23,42.93 30.23,39.12 v29.21,38.1 v29.21,34.29 v29.21,30.48
  Bottom 0.254: v29.21,68.58 U4.12
COL9  (via drill 0.51)  (18 unrouted)
  Top 0.254: v33.15,94.61 33.02,94.74 | v31.75,73.28 32.12,72.91 | v32.38,69.09 32.4,69.1
  gnd 0.254: v33.15,94.61 33.15,91.57 v33.02,91.44 v33.02,87 v33.02,83.82 v33.02,80.01 v33.02,76.2 31.75,74.93 v31.75,73.28 32.38,72.64 v32.38,69.09 32.38,65.41 v33.02,64.77 33.02,61.98 v33.53,61.47 33.53,57.66 v33.02,57.15 v33.02,54.23 v33.02,49.02 v33.02,45.72 v33.02,42.8 33.02,42.43 v33.02,38.1 v33.02,34.29 v33.02,30.48
  Bottom 0.254: U4.13 31.75,55.88 v33.02,57.15
COL10  (via drill 0.51)  (18 unrouted)
  Top 0.254: v35.56,83.82 36.08,84.34 | v35.56,80.01 36.08,80.53 | v36.07,77.22 36.56,76.72 | v36.2,72.9 36.82,72.9 | v37.34,61.47 36.84,61.47 | v36.32,53.85 36.82,53.85 | v36.2,30.99 36.82,30.99
  gnd 0.254: v36.83,95.25 v36.83,91.44 v36.83,87 35.56,85.72 v35.56,83.82 v35.56,80.01 35.56,77.72 v36.07,77.22 36.07,73.03 v36.2,72.9 36.2,69.22 v36.83,68.58 v36.96,64.14 36.96,61.85 v37.34,61.47 37.34,57.66 v36.83,57.15 36.83,54.36 | 36.83,54.36 v36.32,53.85 | 36.83,54.36 v36.83,48.9 v36.83,45.72 v36.83,41.91 v36.83,38.1 v36.83,34.29 36.83,31.62 v36.2,30.99
  Bottom 0.254: U5.5 50.8,93.73 50.67,93.85 44.32,93.85 41.15,90.68 37.59,90.68 v36.83,91.44
COL11  (via drill 0.51)  (18 unrouted)
  Top 0.254: v41.91,80.01 41.39,80.53 | v40.26,72.9 40.5,72.91 | v41.01,77.09 v41.02,77.09 40.65,76.72 | v41.02,64.9 v41.02,64.91 | v41.15,61.47 41.14,61.48
  gnd 0.254: v40.64,95.25 v40.64,91.44 v40.64,87 v40.64,83.82 40.64,81.28 v41.91,80.01 41.02,79.12 v41.02,77.09 v41.01,77.09 40.13,76.21 v40.26,72.9 39.37,72.14 39.37,68.58 v40.64,68.58 40.64,65.28 v41.02,64.9 41.02,61.59 v41.15,61.47 41.15,57.66 40.65,57.16 | 40.65,57.16 v40.64,57.15 | 40.65,53.35 40.65,57.16 | 40.65,53.35 v40.64,53.34 | 40.65,49.54 40.65,53.35 | 40.65,49.54 v40.64,49.53 | 40.65,45.73 40.65,49.54 | 40.65,45.73 v40.64,45.72 | 40.65,41.92 40.65,45.73 | 40.65,41.92 v40.64,41.91 | 40.65,38.11 40.65,41.92 | 40.65,38.11 v40.64,38.1 | 40.65,34.3 40.65,38.11 | 40.65,34.3 v40.64,34.29 | 40.65,34.3 40.65,30.49 v40.64,30.48
  Bottom 0.254: v40.64,91.44 43.56,94.36 51.44,94.36 52.07,93.73 U5.6
COL12  (via drill 0.51)  (18 unrouted)
  Top 0.254: v45.85,73.15 45.2,72.91 | v45.72,68.58 45.2,69.1 | v45.72,64.77 45.2,65.29 | v45.72,60.96 45.2,61.48 | v45.72,57.15 45.2,57.67
  gnd 0.254: v44.45,95.25 v44.45,91.44 v44.45,87.63 v44.45,83.82 v44.45,80.01 v43.94,76.71 45.85,74.8 v45.85,73.15 45.85,72.77 46.23,72.39 46.23,69.09 v45.72,68.58 v45.72,64.77 v45.72,60.96 v45.72,57.15 45.72,54.61 v44.45,53.34 v44.45,48.9 v44.45,45.72 v44.45,41.91 v44.45,37.97 v44.45,34.16 v44.45,30.48
  Bottom 0.254: U5.7 53.34,95.25 52.7,96.01 45.09,96.01 v44.45,95.25
COL13  (via drill 0.51)  (18 unrouted)
  Top 0.254: v49.53,69.09 48.27,69.09 | v46.99,53.34 47.51,53.86
  gnd 0.254: v48.26,95.25 v48.26,90.93 v48.26,87.63 v48.26,83.82 v48.26,80.01 v48.26,76.2 v48.26,72.39 48.26,70.36 v49.53,69.09 49.53,66.04 v48.26,64.77 v48.26,60.96 v48.26,57.15 48.26,54.61 v46.99,53.34 48.26,52.07 v48.26,49.53 v48.26,45.72 v48.26,41.91 v48.26,38.1 v48.26,34.29 v48.26,30.48
  Bottom 0.254: U5.8 54.61,91.95 54.36,91.69 50.67,91.69 49.91,90.93 v48.26,90.93
COL14  (via drill 0.51)  (18 unrouted)
  Top 0.254: v49.78,34.8 49.8,34.81
  gnd 0.254: v52.07,95.25 v52.07,90.93 v52.07,87.63 v52.07,83.82 v52.07,80.01 v52.07,76.2 v52.07,72.39 v52.07,68.58 v52.07,64.77 v52.07,60.96 v52.07,57.15 v52.07,53.34 v52.07,49.53 v52.07,45.72 v52.07,41.91 v52.07,38.1 49.78,35.81 v49.78,34.8 49.78,32.77 v52.07,30.48
  Bottom 0.254: U5.9 55.88,91.82 55.75,91.69 55.24,91.69 54.48,90.93 v52.07,90.93
COL15  (via drill 0.51)  (18 unrouted)
  Top 0.254: v57.15,68.58 56.63,69.1 | v57.15,34.29 56.63,34.81 | v57.15,30.48 56.63,31
  gnd 0.254: v55.88,95.25 v55.88,90.81 v55.88,87.63 v55.88,83.82 v55.88,80.01 v55.88,76.2 v55.88,72.39 57.15,71.12 v57.15,68.58 57.15,66.04 v55.88,64.77 v55.88,60.96 v55.88,57.15 v55.88,53.34 v55.88,49.53 v55.88,45.72 v55.88,41.91 v55.88,38.1 57.15,36.83 v57.15,34.29 v57.15,30.48
  Bottom 0.254: U5.10 57.15,91.06 56.9,90.81 v55.88,90.81
COL16  (via drill 0.51)  (18 unrouted)
  gnd 0.254: v59.69,95.25 v59.69,90.81 v59.69,87.63 v59.69,83.82 v59.69,80.01 v59.69,76.2 v59.69,72.39 v59.69,68.58 v59.69,64.77 v59.69,60.96 v59.69,57.15 v59.69,53.34 v59.69,49.53 v59.69,45.72 v59.69,41.91 v59.69,38.1 v59.69,34.29 v59.69,30.48
  Bottom 0.254: U5.11 58.42,93.98 v59.69,95.25
COL17  (via drill 0.51)
  Top 0.254: v62.48,91.95 63.49,91.95
  gnd 0.254: v63.5,95.25 63.5,92.96 63.37,92.84 | 63.37,92.84 v62.48,91.95 | 63.37,92.84 63.5,92.71 v63.5,87.63 v63.5,83.82 v63.5,80.9 v63.5,76.2 v63.5,72.39 v63.5,68.58 v63.5,64.77 v63.5,60.96 v63.5,57.15 v63.5,53.34 v63.5,49.53 v63.5,45.72 v63.5,41.91 v63.5,38.1 v63.5,34.29 v63.5,30.48
  Bottom 0.254: U5.12 61.72,92.71 v62.48,91.95
COL18  (via drill 0.51)  (18 unrouted)
  Top 0.254: 68.06,95.77 68.58,95.25 68.58,91.96 68.58,88.15 68.58,84.34 68.58,80.53 68.58,80.01 | 67.83,31 68.58,31.75 68.58,34.81 68.58,38.62 68.58,42.43 68.58,46.24 68.58,50.05 68.58,53.86 68.58,57.67 68.58,61.48 68.58,65.29 68.58,69.1 68.58,72.91 68.58,76.72 68.58,80.01 | 68.58,80.01 v69.6,80.01
  Bottom 0.254: U5.13 59.69,81.28 60.96,80.01 v69.6,80.01
GND  (via drill 0.51, 3.94)  (30 unrouted)
  Top 0.254: v13.97,16.51 B5.3
  gnd 0.254: v46.99,64.01 46.99,58.17 v46.86,58.04
  Bottom 0.254: v13.97,16.51 BAT1.2 | C5.2 46.1,63.12 v46.99,64.01 | v46.86,58.04 48.39,58.04 arc90 49.15,58.8 49.15,59.65 arc90 C1.2 | RA1.2 43.18,54.61 | RA2.2 64.35,86.36
  other vias: 5.08,101.73 66.04,101.73
  pour Bottom (isolate 0.152): 0,0 71.12,0 71.12,105.41 0,105.41
  pour Top (isolate 0.254): 0,105.41 0,0 71.12,0 71.12,105.41
LED18  (17 unrouted)
LED27  (17 unrouted)
LINE1  (via drill 0.51)  (6 unrouted)
  Bottom 0.254: Q1/2.6 3.78,97.82 v2.54,99.06
LINE2  (6 unrouted)
LINE3  (6 unrouted)
LINE4  (6 unrouted)
LINE5  (6 unrouted)
LINE6  (6 unrouted)
LINE7  (6 unrouted)
LINE8  (6 unrouted)
LINE9  (6 unrouted)
LINE10  (6 unrouted)
LINE11  (6 unrouted)
LINE12  (6 unrouted)
LINE13  (6 unrouted)
LINE14  (6 unrouted)
LINE15  (6 unrouted)
LINE16  (6 unrouted)
LINE17  (6 unrouted)
LINE18  (6 unrouted)
MISO  (via drill 0.51)
  Top 0.254: JP5.2 v38.1,11.43
  gnd 0.254: v34.8,74.04 34.8,72.77 34.29,72.39 34.29,26.67 38.1,22.86 v38.1,11.43
  Bottom 0.254: U1.16 34.41,73.92 v34.8,74.04
MOSI  (via drill 0.51)
  Top 0.254: v40.64,6.35 JP5.1
  gnd 0.254: v16.13,65.02 16.13,63.12 15.24,62.23 15.24,29.21 17.78,26.67 17.78,22.86 34.29,6.35 v40.64,6.35
  vcc 0.254: v19.81,73.41 16.51,73.41 15.88,72.77 15.88,65.28 v16.13,65.02
  Bottom 0.254: U1.15 32.92,73.12 32.77,73.28 32.77,73.66 32.26,74.17 20.57,74.17 v19.81,73.41 | v16.13,65.02 16.51,65.41 U4.2
N$1  (1 unrouted)
N$2
  Bottom 0.254: R1.2 6.38,97.79 Q1/2.1
N$3  (1 unrouted)
N$4  (1 unrouted)
N$5  (1 unrouted)
N$6  (1 unrouted)
N$7  (1 unrouted)
N$8  (1 unrouted)
N$9  (1 unrouted)
N$10  (1 unrouted)
N$11  (1 unrouted)
N$12  (1 unrouted)
N$13  (1 unrouted)
N$14  (1 unrouted)
N$15  (1 unrouted)
N$16  (1 unrouted)
N$48  (1 unrouted)
N$55  (1 unrouted)
N$127
  Bottom 0.254: U5.23 46.99,83.82 48.26,85.09 60.33,85.09 61.59,83.82 61.59,82.55 RA2.1
N$139
  Bottom 0.254: RA1.1 36.7,54.61 33.27,58.04 16.89,58.04 16.51,57.66 U4.23
PB0  (via drill 0.51)
  Top 0.254: RA3.2 60.33,17.36 S2.1 60.33,20.95 v59.69,21.59
  gnd 0.254: v30.48,69.72 30.61,69.72 31.75,68.58 31.75,24.13 v35.56,20.32
  vcc 0.254: v35.56,20.32 36.83,21.59 v59.69,21.59
  Bottom 0.254: U1.12 31.48,70.72 v30.48,69.72
PB1  (via drill 0.51)
  vcc 0.254: v49.53,91.69 49.53,90.17 48.26,88.9 44.45,88.9 41.91,86.36 41.91,82.55 40.64,81.28 39.37,81.28 38.1,80.01 38.1,75.95 35.31,73.28 v35.31,71.5 | v26.67,68.58 25.4,67.31 20.32,67.31 v19.3,66.04
  Bottom 0.254: v49.53,91.69 U5.4 | v35.31,71.5 33.83,71.5 U1.13 29.61,71.52 v26.67,68.58 | U4.4 v19.3,66.04
PB6
  Bottom 0.254: C1.1 XTL.1 36.83,59.69 36.1,60.42 U1.7
PB7
  Bottom 0.254: XTL.2 32.6,60.29 C2.1 34.29,62.99 35.3,64 U1.8
PC1  (via drill 0.51)
  Top 0.254: RA6.1 26.67,17.78 | 26.67,17.78 B2.1 | v35.69,28.83 26.67,20.32 26.67,17.78
  gnd 0.254: v38.73,56.64 38.73,32 v35.69,28.83
  vcc 0.254: v41.27,75.56 39.12,73.41 39.12,65.28 38.73,64.9 v38.73,56.64
  Bottom 0.254: U1.24 41.05,75.56 v41.27,75.56
PC2  (via drill 0.51)
  Top 0.254: RA7.1 13.97,8.89 | 13.97,8.89 B3.1 | 13.97,8.89 v21.59,8.89
  gnd 0.254: v42.93,75.44 41.66,74.17 41.66,72.26 42.55,71.37 42.55,28.57 v39.37,25.4
  vcc 0.254: v39.37,25.4 35.56,25.4 21.59,11.43 v21.59,8.89
  Bottom 0.254: U1.25 42.42,74.56 v42.93,75.44
PC3  (via drill 0.51)
  Top 0.254: v8.89,27.94 8.89,20.32 6.35,17.78 6.35,13.97 6.99,13.34 | 6.99,13.34 7.62,12.7 B4.1 | RA8.1 6.77,13.12 6.99,13.34
  gnd 0.254: v40.13,71.63 41.15,71.12 41.91,71.12 41.91,30.48 v39.37,27.94
  vcc 0.254: v8.89,27.94 v39.37,27.94
  Bottom 0.254: U1.26 41.12,73.12 40.58,73.66 39.62,73.66 39.37,73.41 39.37,72.39 v40.13,71.63
PC4  (via drill 0.41, 0.51)
  Top 0.254: B5.1 11.43,23.5 RA9.1 v11.43,25.4
  vcc 0.254: v11.43,25.4 12.7,26.67 40.64,26.67 41.91,27.94 41.91,54.1 42.67,54.86 42.67,70.99 v43.69,72.01
  Bottom 0.254: JP1.2 41.15,82.04 42.67,80.52 42.67,76.83 43.94,75.56 43.94,72.26 v43.69,72.01 43.43,72.26 42.45,72.26 U1.27
PC5
  Bottom 0.254: JP2.2 39.62,83.82 39.88,83.57 39.88,83.06 40.26,82.68 41.15,82.68 43.18,80.77 43.18,78.87 43.69,78.23 44.32,77.47 44.7,76.96 44.7,73.03 44.45,72.77 44.45,71.5 44.2,71.25 43.31,71.25 43.05,71.5 42.41,71.5 U1.28
PD0
  Bottom 0.254: JP3.2 40.39,79.5 42.16,77.72 42.16,75.18 41.15,74.3 38.86,74.3 38.86,69.85 42.32,69.85 U1.30
PD1
  Bottom 0.254: 42.49,69.22 U1.31 42.42,69.09 43.56,69.09 46.74,72.01 46.74,75.82 45.09,77.34 45.09,77.6 43.69,79.12 43.69,83.31 41.78,85.09 JP4.2
PD2  (via drill 0.51)
  vcc 0.254: v43.18,84.96 43.18,76.33 44.07,75.56 44.2,75.44 44.2,73.03 44.45,72.64 44.45,68.45 v43.94,67.82
  Bottom 0.254: U1.32 43.44,68.32 v43.94,67.82 | v43.18,84.96 43.18,85.34 42.55,85.98 39.62,85.98 39.37,86.23 31.75,86.23 30.48,87.5 U2.21
PD3  (via drill 0.51)
  gnd 0.254: v31.75,87.63 31.75,76.2 30.48,74.93 v30.48,72.39
  vcc 0.254: v30.48,72.39 33.02,72.39 35.56,69.98 37.85,69.85 v38.23,69.34
  Bottom 0.254: v31.75,87.63 U2.20 | v38.23,69.34 38.48,69.34 40.01,67.82 40.64,67.82 40.89,67.56 U1.1
PD4  (via drill 0.51)
  gnd 0.254: v39.75,64.39 39.5,53.47 v39.5,53.34
  Bottom 0.254: U1.2 40.1,65.12 v39.75,64.39 | v39.5,53.34 38.86,53.34 38.35,52.83 32.26,52.83 31.75,52.32 U3.23
PD5  (via drill 0.51)
  vcc 0.254: v35.69,68.2 35.31,52.96 33.02,50.8 32.64,50.8 v30.86,49.02
  Bottom 0.254: U1.9 35.57,68.32 v35.69,68.2 | v30.86,49.02 30.48,49.4 U3.22
PD6  (via drill 0.51)
  vcc 0.254: v29.46,48.9 29.46,51.05 31.75,53.34 31.75,66.93 33.15,68.33 34.29,68.33 v35.18,69.22
  Bottom 0.254: U3.21 29.21,49.15 v29.46,48.9 | v35.18,69.22 35.08,69.12 U1.10
PD7  (via drill 0.51)
  gnd 0.254: v30.48,68.58 30.48,54.23 v30.73,53.98
  Bottom 0.254: U1.11 31.82,69.92 v30.48,68.58 | v30.73,53.98 30.73,53.21 30.1,52.58 28.45,52.58 27.94,52.07 U3.20
ROW1
  Bottom 0.254: U2.2 27.94,97.66 8.47,97.66 R1.1
ROW2  (1 unrouted)
  Bottom 0.254: U2.3 29.21,97.79 28.57,97.16 10.67,97.16 9.4,95.89 9.4,93.13
ROW3  (1 unrouted)
  Bottom 0.254: U2.4 30.48,97.79 29.21,96.52 12.7,96.52 11.43,95.25 11.43,91.31 9.91,89.79
ROW4  (1 unrouted)
  Bottom 0.254: U2.5 31.75,97.79 29.97,96.01 13.08,96.01 12.06,95 12.06,86.36 11.18,85.47
ROW5  (1 unrouted)
  Bottom 0.254: U2.6 33.02,97.79 30.48,95.38 26.8,95.38 25.65,94.36 13.08,94.36 12.7,93.98 12.7,83.95 10.92,82.17
ROW6  (1 unrouted)
  Bottom 0.254: U2.7 34.29,97.79 30.35,93.6 16.13,93.6 15.24,92.71 15.24,80.01 13.08,77.85
ROW7  (1 unrouted)
  Bottom 0.254: U2.8 35.56,97.79 34.54,96.77 34.16,96.77 30.61,93.22 30.61,93.09 17.91,93.09 16.51,91.44 16.51,80.39 10.67,74.55
ROW8  (1 unrouted)
  Bottom 0.254: U2.9 36.83,97.16 32.13,92.46 20.07,92.46 19.05,91.44 19.05,78.74 11.43,71.12 9.11,71.12
ROW9  (1 unrouted)
  Bottom 0.254: U2.10 38.1,97.79 31.24,90.81 26.16,90.81 25.4,90.17 20.7,90.17 19.68,89.15 19.68,76.83 12.7,69.85 10.29,69.85 9.14,68.71 9.14,66.84
ROW10  (1 unrouted)
  Bottom 0.254: U3.2 31.75,47.24 30.99,48.01 14.22,48.01 12.95,49.28 12.95,61.09 11.3,62.74
ROW11  (1 unrouted)
  Bottom 0.254: U3.3 30.48,42.04 31.11,42.67 31.11,46.99 30.61,47.5 14.1,47.5 12.45,49.15 12.45,58.29 11.56,59.18
ROW12  (1 unrouted)
  Bottom 0.254: U3.4 29.21,44.45 26.92,46.99 13.97,46.99 11.94,49.02 11.94,54.1 10.92,55.12
ROW13  (1 unrouted)
  Bottom 0.254: 10.67,51.56 11.43,50.8 11.43,48.77 13.84,46.48 26.42,46.48 27.94,44.83 U3.5
ROW14  (1 unrouted)
  Bottom 0.254: U3.6 26.67,42.04 27.18,42.55 27.18,43.81 26.04,44.96 13.59,44.96 10.92,47.62
ROW15  (1 unrouted)
  Bottom 0.254: U3.7 25.4,43.69 24.64,44.45 11.05,44.45 10.54,43.94
ROW16  (1 unrouted)
  Bottom 0.254: U3.8 24.13,43.05 23.24,43.94 14.1,43.94 10.16,40.01
ROW17  (1 unrouted)
  Bottom 0.254: U3.9 22.86,41.78 22.35,42.29 22.23,42.29 21.08,43.43 14.35,43.43 11.56,40.64 11.56,37.34 10.54,36.32
ROW18  (1 unrouted)
  Bottom 0.254: U3.10 21.59,42.04 20.7,42.93 16.26,42.93 12.7,39.37 12.7,35.81 11.43,34.54 11.43,33.53 10.16,32.26
RST  (via drill 0.51)
  Top 0.254: RA4.2 46.35,17.36 S1.1 46.35,22.23 v45.72,22.86 | JP5.5 v30.48,11.43
  gnd 0.254: v45.72,22.86 43.69,24.89 43.69,54.1 44.83,55.24 44.83,69.34 45.34,69.85 v45.34,71.88
  vcc 0.254: v30.48,11.43 30.48,17.78 35.56,22.86 v45.72,22.86
  Bottom 0.254: U1.29 43.29,70.72 44.07,70.74 44.58,70.74 v45.34,71.88
SCK  (via drill 0.51)
  Top 0.254: JP5.3 v35.56,7.62
  gnd 0.254: v18.8,64.52 18.8,38.35 20.7,36.45 20.7,26.29 35.56,11.43 v35.56,7.62
  vcc 0.254: v34.8,76.83 34.8,81.79 38.1,85.09 38.1,87.63 40.64,90.17 46.48,90.17 v46.99,90.68 | v16.64,69.72 16.64,68.2 v18.8,64.52
  Bottom 0.254: v34.8,76.83 35.3,76.33 U1.17 19.53,75.41 16.64,72.52 v16.64,69.72 | v46.99,90.68 46.99,91.06 47.62,91.69 48.13,91.69 48.26,91.82 U5.3 | v18.8,64.52 18.29,64.77 17.78,65.28 U4.3
SDI  (via drill 0.51)
  vcc 0.254: v46.86,92.58 17.78,92.71 15.24,90.17 15.24,55.5 v16.76,54.48
  Bottom 0.254: v46.86,92.58 U5.2 | v16.76,54.48 17.78,54.61 U4.22
VCC  (via drill 0.51)  (14 unrouted)
  Top 0.254: 10.16,14.39 10.16,20.74 RA9.2 13.12,20.74 13.97,21.59 15.24,21.59 16.51,22.86 v16.51,29.21 | 33.02,14.39 RA6.2 10.16,14.39 | 33.02,14.39 48.26,14.39 | 48.26,14.39 RA4.1 RA3.1 | 48.26,14.39 v48.26,3.81 | 10.16,10.16 10.16,14.39 | RA8.2 10.16,10.16 | 10.16,10.16 10.16,9.31 RA7.2 | 33.02,14.39 JP5.4
  gnd 0.254: v23.24,95.25 23.24,87.63 v23.37,87.5
  vcc 0.254: v8.64,86.87 11.94,86.87 12.7,87.63 12.7,92.71 13.97,93.98 21.97,93.98 v23.24,95.25 | v8.64,56.64 12.95,52.32 15.75,52.32 v16.38,52.96 16.38,48.39 16.51,48.01 34.04,48.01 v35.43,49.66
  Bottom 0.254: v48.26,3.81 48.26,3.68 | U3.24 C8.1 35.98,50.2 v35.43,49.66 39.5,49.66 40.64,50.8 41.4,50.8 42.8,52.2 44.58,52.2 46.23,53.85 46.23,54.1 48.01,55.88 49.28,55.88 49.91,56.52 49.91,57.66 50.42,58.17 50.42,61.21 v49.91,61.72 49.78,61.85 47.75,61.85 | Q1/2.5 5.08,95.25 5.08,87.63 5.08,80.01 5.08,72.39 5.08,64.77 5.08,57.15 5.08,49.53 5.08,41.91 5.08,34.29 5.08,31.5 5.33,31.24 16,31.24 16.51,31.75 BAT1.1 v16.51,29.21 | U2.24 24.13,88.9 C7.1 23.84,87.5 v23.37,87.5 | U5.24 45.72,78.78 C10.2 45.76,77.43 47.37,76.33 47.37,68.71 48.26,67.31 C12.+ 49.66,67.3 49.66,63.5 47.75,61.85 | 47.75,61.85 44.32,61.85 43.6,62.32 C5.1 39.37,63.12 38.5,63.86 38.5,64.9 | 38.5,64.9 U1.4 | U1.6 36.9,65.21 37.21,64.9 38.5,64.9 | U4.24 C9.2 15.28,52.96 v16.38,52.96 | v8.64,86.87 7.87,87.63 | v8.64,56.64 8.13,57.15

## Text on the board
_tsilk: LayerOne | Speaker | designedBy | KRS